# EAGLE board Midi_LED_Rings__Black_10x5_gerbers_v4 (EAGLE 6.5.0)
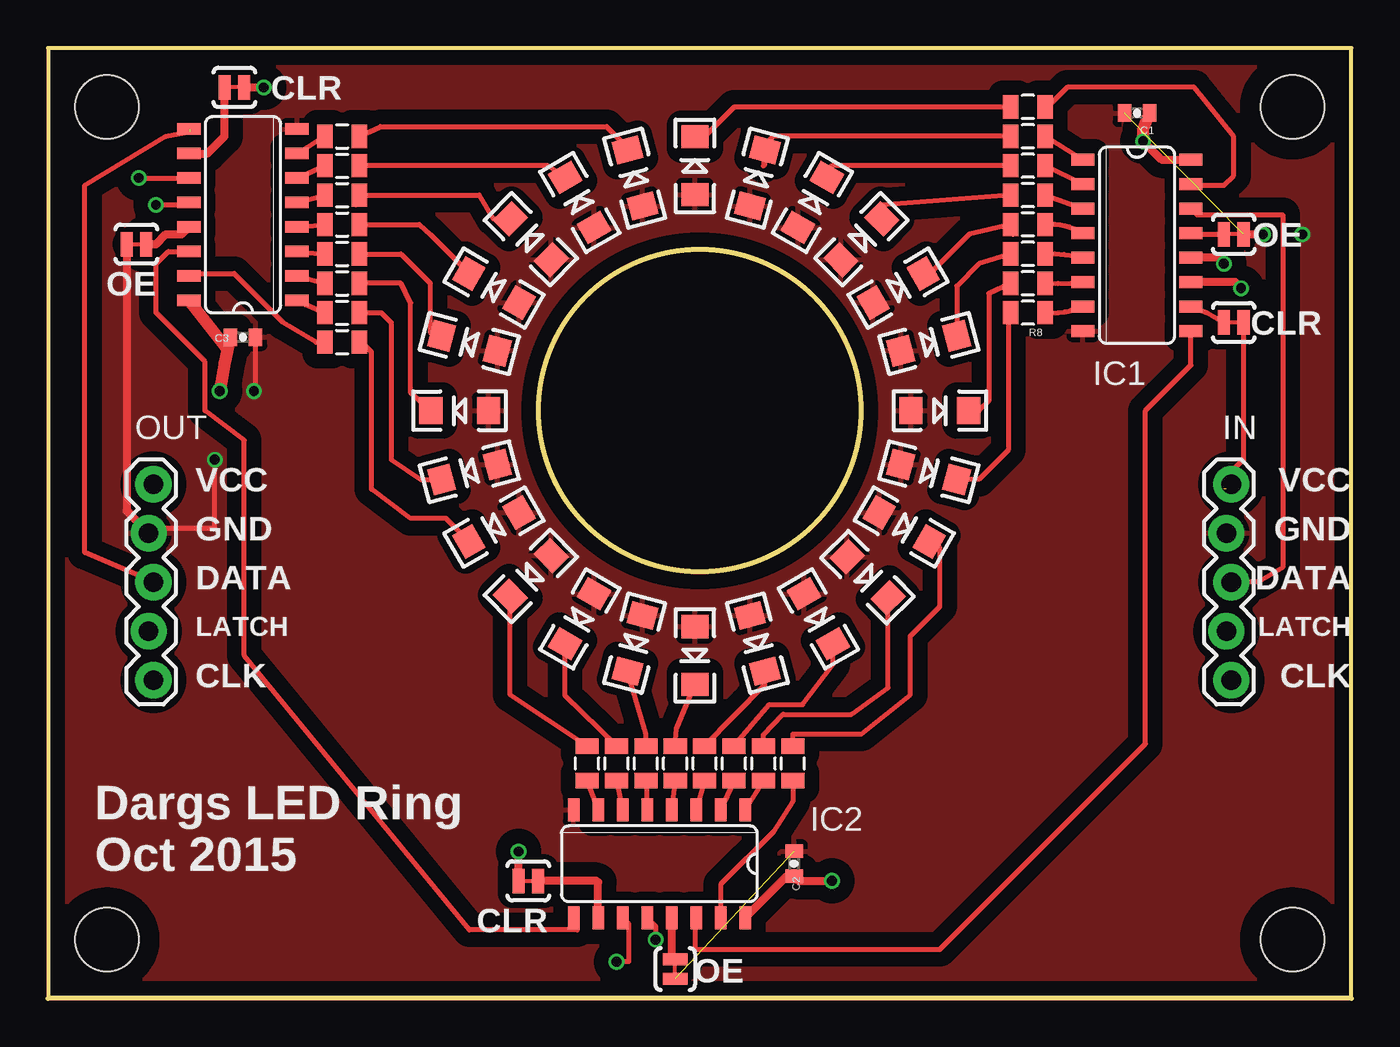
[diagram p0: board, top side]
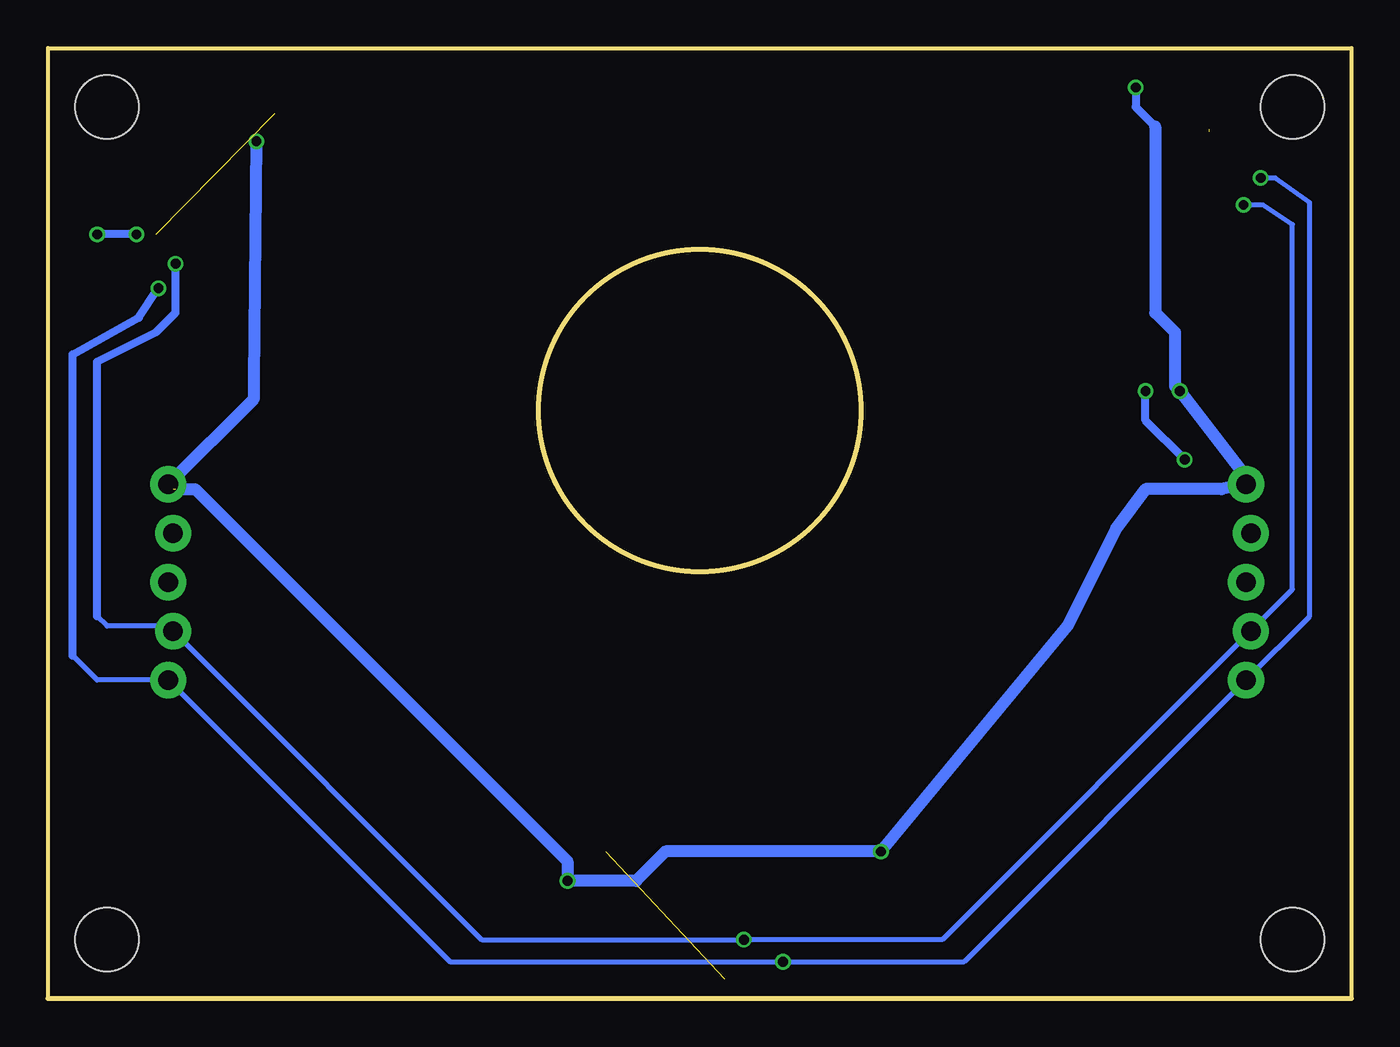
[diagram p1: board, bottom side, seen from below]

Size 67.56 x 49.28 mm. Coordinates in mm from the lower left corner, seen from the top.
Outline: 67.56,0 67.56,49.28 0,49.28 0,0 67.56,0
Outline: circle at 33.78,30.48 radius 8.35
Copper layers (1*16): Top 0.035mm / dielectric 1.5mm / Bottom 0.035mm
Design rules "ITEADstudio_DRC": minimum track width 6mil, minimum drill 12mil, track to track 6mil, track to pad 6mil, pad to pad 6mil, via to via 6mil, smd to smd 0mil, copper to edge 10mil, drill to drill 10mil, minimum pad ring 10mil, minimum via ring 6mil, stop-mask expansion 2mil, vias tented up to drill 100mil, thermal gap 10mil

## Footprints (pad centres in the part's own frame; a part is rotated, then mirrored left to right if it is on the bottom)
0402-CAP = smd 0.7 x 0.9: 1 -0.65,0; 2 0.65,0
SO16 = smd 0.6 x 1.2: 1 -4.445,-2.8; 2 -3.175,-2.8; 3 -1.905,-2.8; 4 -0.635,-2.8; 5 0.635,-2.8; 6 1.905,-2.8; 7 3.175,-2.8; 8 4.445,-2.8; 9 4.445,2.8; 10 3.175,2.8; 11 1.905,2.8; 12 0.635,2.8; 13 -0.635,2.8; 14 -1.905,2.8; 15 -3.175,2.8; 16 -4.445,2.8
1X05_LOCK = drill 1.016 pad 1.88: 1 0,0.127; 2 2.54,-0.127; 3 5.08,0.127; 4 7.62,-0.127; 5 10.16,0.127
STAND-OFF = hole 3.302: 0,0
LED-1206 = smd 1.2 x 1.4: A -1.5,0; C 1.5,0
0805 = smd 0.8 x 1.2: 1 -0.9,0; 2 0.9,0
SJ_2S-TRACE = smd 0.635 x 1.27: 1 -0.508,0; 2 0.508,0

## Placement (x,y rotation side)
C1  0.1uF  [0402-CAP]  56.45,45.91 180 top
C2  0.1uF  [0402-CAP]  38.67,6.99 90 top
C3  0.1uF  [0402-CAP]  10.1,34.29 0 top
IC1  74LS595D  [SO16]  56.45,39.05 270 top
IC2  74LS595D  [SO16]  31.69,6.99 180 top
IC3  74LS595D  [SO16]  10.1,40.64 90 top
IN  [1X05_LOCK]  61.21,26.67 270 top
JP1  STAND-OFF  [STAND-OFF]  64.52,46.23 0 bottom
JP10  STAND-OFF  [STAND-OFF]  64.52,3.05 0 bottom
JP11  STAND-OFF  [STAND-OFF]  3.05,3.05 0 bottom
JP12  STAND-OFF  [STAND-OFF]  3.05,46.23 0 bottom
LED1  1  [LED-1206]  33.53,43.18 90 top
LED2  2  [LED-1206]  36.77,42.55 75 top
LED3  3  [LED-1206]  39.62,41.27 60 top
LED4  4  [LED-1206]  42.16,39.37 45 top
LED5  5  [LED-1206]  44.07,36.83 30 top
LED6  6  [LED-1206]  45.66,33.97 15 top
LED7  7  [LED-1206]  46.23,30.48 0 top
LED8  8  [LED-1206]  45.66,27.3 345 top
LED9  9  [LED-1206]  44.39,24.45 330 top
LED10  10  [LED-1206]  42.48,21.84 315 top
LED11  11  [LED-1206]  39.94,19.68 300 top
LED12  12  [LED-1206]  36.77,18.41 285 top
LED13  13  [LED-1206]  33.53,17.78 270 top
LED14  195  [LED-1206]  30.42,18.41 255 top
LED15  15  [LED-1206]  27.56,19.68 240 top
LED16  16  [LED-1206]  25.02,21.91 225 top
LED17  17  [LED-1206]  23.11,24.45 210 top
LED18  18  [LED-1206]  21.84,27.3 195 top
LED19  19  [LED-1206]  21.34,30.48 180 top
LED20  20  [LED-1206]  21.84,33.97 165 top
LED21  21  [LED-1206]  23.11,36.83 150 top
LED22  22  [LED-1206]  25.02,39.37 135 top
LED23  23  [LED-1206]  27.56,41.27 120 top
LED24  24  [LED-1206]  30.42,42.55 105 top
OUT  [1X05_LOCK]  5.33,26.67 270 top
R1  300  [0805]  50.8,46.23 180 top
R2  300  [0805]  50.8,44.7 180 top
R3  300  [0805]  50.8,43.18 180 top
R4  300  [0805]  50.8,41.66 180 top
R5  300  [0805]  50.8,40.13 180 top
R6  300  [0805]  50.8,38.61 180 top
R7  300  [0805]  50.8,37.08 180 top
R8  300  [0805]  50.8,35.56 180 top
R9  300  [0805]  38.61,12.19 90 top
R10  300  [0805]  35.56,12.19 90 top
R11  300  [0805]  37.08,12.19 90 top
R12  300  [0805]  34.04,12.19 90 top
R13  300  [0805]  32.51,12.19 90 top
R14  300  [0805]  30.99,12.19 90 top
R15  300  [0805]  29.46,12.19 90 top
R16  300  [0805]  27.94,12.19 90 top
R21  300  [0805]  15.24,34.04 0 top
R22  300  [0805]  15.24,37.08 0 top
R23  300  [0805]  15.24,35.56 0 top
R24  300  [0805]  15.24,38.61 0 top
R25  300  [0805]  15.24,40.13 0 top
R26  300  [0805]  15.24,41.66 0 top
R27  300  [0805]  15.24,43.18 0 top
R28  300  [0805]  15.24,44.7 0 top
SJ1  SOLDERJUMPERTRACE  [SJ_2S-TRACE]  61.47,35.05 180 top
SJ2  SOLDERJUMPERTRACE  [SJ_2S-TRACE]  61.47,39.62 180 top
SJ3  SOLDERJUMPERTRACE  [SJ_2S-TRACE]  24.89,6.1 0 top
SJ4  SOLDERJUMPERTRACE  [SJ_2S-TRACE]  32.51,1.52 90 top
SJ5  SOLDERJUMPERTRACE  [SJ_2S-TRACE]  9.65,47.24 180 top
SJ6  SOLDERJUMPERTRACE  [SJ_2S-TRACE]  4.57,39.12 0 top

## Library data of the parts
C1-C3 IC1-IC3 JP1 JP10-JP12 R1-R16 R21-R28 = SparkFun
IN OUT = SparkFun-Connectors
LED1-LED24 = SparkFun-LED
SJ1-SJ6 = SparkFun-Passives

## Nets
1-2: IC1.9 IC2.14
2: LED2.C R2.2
2-3: IC2.9 IC3.14
3: LED3.C R3.2
4: LED4.C R4.2
5: LED5.C R5.2
6: LED6.C R6.2
7: LED7.C R7.2
8: LED8.C R8.2
9: LED9.C R9.2
10: LED10.C R11.2
11: LED11.C R10.2
12: LED12.C R12.2
13: LED13.C R13.2
14: LED14.C R14.2
15: LED15.C R15.2
16: LED16.C R16.2
17: LED17.C R21.2
18: LED18.C R23.2
19: LED19.C R22.2
20: LED20.C R24.2
21: LED21.C R25.2
22: LED22.C R26.2
23: LED23.C R27.2
24: LED24.C R28.2
CLK: IC1.11 IC2.11 IC3.11 IN.5 OUT.5
DATAIN: IC1.14 IN.3
DATAOUT: IC3.9 OUT.3
GND: C1.2 C2.2 C3.2 IC1.8 IC2.8 IC3.8 IN.2 LED1.A LED2.A LED3.A LED4.A LED5.A LED6.A LED7.A LED8.A LED9.A LED10.A LED11.A LED12.A LED13.A LED14.A LED15.A LED16.A LED17.A LED18.A LED19.A LED20.A LED21.A LED22.A LED23.A LED24.A OUT.2 SJ2.1 SJ4.1 SJ6.1
LATCH: IC1.12 IC2.12 IC3.12 IN.4 OUT.4
N$1: IC1.15 R1.1
N$2: IC1.1 R2.1
N$3: IC1.2 R3.1
N$4: IC1.3 R4.1
N$5: IC1.4 R5.1
N$6: IC1.5 R6.1
N$7: IC1.6 R7.1
N$8: IC1.7 R8.1
N$9: IC2.15 R9.1
N$10: IC2.1 R11.1
N$11: IC2.2 R10.1
N$12: IC2.3 R12.1
N$13: IC2.4 R13.1
N$14: IC2.5 R14.1
N$15: IC2.6 R15.1
N$16: IC2.7 R16.1
N$17: IC3.15 R21.1
N$18: IC3.1 R23.1
N$19: IC3.2 R22.1
N$20: IC3.3 R24.1
N$21: IC3.4 R25.1
N$22: IC3.5 R26.1
N$23: IC3.6 R27.1
N$24: IC3.7 R28.1
N$25: IC2.13 SJ4.2
N$26: IC2.10 SJ3.2
N$27: IC3.10 SJ5.2
N$28: IC3.13 SJ6.2
N$30: LED1.C R1.2
OE: IC1.13 SJ2.2
SCL: IC1.10 SJ1.2
VCC: C1.1 C2.1 C3.1 IC1.16 IC2.16 IC3.16 IN.1 OUT.1 SJ1.1 SJ3.1 SJ5.1

## Tracks (layer width: path | path; a pad name or v marks a point on that pad's centre or on a via)
1-2
  Top 0.254: IC2.14 33.53,4.12 33.53,2.54 46.23,2.54 56.9,13.21 56.9,30.48 59.25,32.84 IC1.9
2
  Top 0.254: R2.2 37.59,44.7 37.08,44.2 37.08,43.18 37.16,43.25 LED2.C
2-3
  Top 0.254: IC2.9 27.43,3.99 27.43,3.56 21.84,3.56 10.16,17.78 10.16,28.96 8.13,30.48 8.13,33.02 5.59,35.56 5.59,38.1 6.22,38.73 IC3.14
3
  Top 0.254: 50.02,43.18 R3.2 40.64,43.18 40.37,42.91 LED3.C
4
  Top 0.254: R4.2 43.18,41.15 43.23,41.1 LED4.C
5
  Top 0.254: 50.02,39.62 R5.2 47.75,39.62 45.71,37.58 LED5.C
6
  Top 0.254: R6.2 48.26,38.1 47.1,36.95 LED6.C
7
  Top 0.254: LED7.C 48.26,30.48 48.77,30.99 48.77,36.58 R7.2
8
  Top 0.254: R8.2 49.78,35.05 49.78,28.45 48.25,26.92 LED8.C
9
  Top 0.254: R9.2 38.61,13.72 42.16,13.72 44.7,15.75 44.7,18.8 46.23,20.32 46.23,23.37 45.9,23.7 LED9.C
10
  Top 0.254: R11.2 37.08,13.67 38.1,14.73 41.66,14.73 43.54,16.11 LED10.C
11
  Top 0.254: R10.2 37.39,15.24 39.12,15.24 40.69,17.32 LED11.C
12
  Top 0.254: R12.2 37.16,16.28 LED12.C
13
  Top 0.254: R13.2 32.58,13.98 LED13.C
14
  Top 0.254: R14.2 30.99,13.72 LED14.C
15
  Top 0.254: R15.2 26.81,15.69 LED15.C
16
  Top 0.254: R16.2 23.96,15.74 LED16.C
17
  Top 0.254: LED17.C 20.62,24.89 18.8,24.89 16.76,26.42 16.76,33.53 16.38,33.91 R21.2
18
  Top 0.254: R23.2 16.46,35.56 17.27,35.56 17.78,35.05 17.78,27.94 19.31,26.92 LED18.C
19
  Top 0.254: LED19.C 18.8,31.39 18.8,36.07 18.29,37.08 R22.2
20
  Top 0.254: 15.95,38.61 R24.2 18.29,38.61 19.81,37.08 19.81,34.54 20,34.36 LED20.C
21
  Top 0.254: R25.2 19.26,40.13 19.81,39.62 21.82,37.62 LED21.C
22
  Top 0.254: 15.95,41.15 R26.2 22.35,41.66 23.07,40.43 LED22.C
23
  Top 0.254: LED23.C 25.91,43.18 R27.2
24
  Top 0.254: R28.2 17.22,45.21 28.96,45.21 30.17,43.99 LED24.C
CLK  (via drill 0.51)
  Top 0.254: v4.7,42.55 IC3.11 | IC2.11 30.1,3.87 30.1,1.91 v29.46,1.91
  Top 0.406: v61.85,36.83 61.53,37.15 IC1.11
  Bottom 0.254: v4.7,42.55 3.94,42.55 2.16,41.27 2.16,19.81 OUT.5 20.07,1.91 v29.46,1.91 46.74,1.91 IN.5 65.02,16.51 66.29,17.78
  Bottom 0.406: 66.29,17.78 66.29,33.4 62.87,35.31 v61.85,36.83
DATAIN
  Top 0.254: IC1.14 59.57,40.64 64.01,40.64 64.01,22.35 62.74,21.59 IN.3
DATAOUT  (1 unrouted)
  Top 0.254: OUT.3 1.91,23.11 1.91,42.16 6.1,44.7 7.37,44.96 | 7.37,45.09 IC3.9
GND  (via drill 0.51)  (2 unrouted)
  Top 0.254: OUT.2 5.46,24.38 8.64,24.38 v8.64,27.94 | v10.67,31.5 10.75,31.57 C3.2
  Top 0.406: SJ6.1 4.06,25.27 OUT.2 | SJ2.1 v62.99,39.62
  Bottom 0.406: v8.64,27.94 10.67,29.97 v10.67,31.5 | v62.99,39.62 v65.02,39.62
  pour Top (isolate 0.762): 67.06,0.51 67.06,48.77 0.51,48.77 0.51,0.51
LATCH  (via drill 0.51)
  Top 0.254: IC2.12 31.5,3.74 v31.5,3.05 | IC3.12 7.17,41.15 v5.59,41.15
  Top 0.406: v60.96,38.1 60.64,38.42 IC1.12
  Bottom 0.254: 65.02,19.81 64.52,19.3 61.34,19.3 IN.4 45.09,3.05 v31.5,3.05 21.21,3.05 OUT.4 3.05,21.21 3.05,40.13 4.57,41.15 v5.59,41.15
  Bottom 0.406: 65.02,19.81 65.02,33.02 61.98,34.54 60.96,35.56 v60.96,38.1
N$1
  Top 0.254: IC1.15 59.31,42.16 60.96,42.16 61.47,42.67 61.47,44.7 59.44,47.24 52.83,47.24 51.9,46.31 R1.1
N$2
  Top 0.254: R2.1 IC1.1
N$3
  Top 0.254: R3.1 IC1.2
N$4
  Top 0.254: R4.1 IC1.3
N$5
  Top 0.254: R5.1 arc-37 IC1.4
N$6
  Top 0.254: R6.1 arc-16 IC1.5
N$7
  Top 0.254: R7.1 arc9 IC1.6
N$8
  Top 0.254: R8.1 arc27 IC1.7
N$9
  Top 0.254: R9.1 38.61,10.21 37.59,8.64 34.86,5.91 IC2.15
N$10
  Top 0.254: R11.1 IC2.1
N$11
  Top 0.254: R10.1 IC2.2
N$12
  Top 0.254: R12.1 IC2.3
N$13
  Top 0.254: R13.1 IC2.4
N$14
  Top 0.254: R14.1 IC2.5
N$15
  Top 0.254: R15.1 IC2.6
N$16
  Top 0.254: R16.1 IC2.7
N$17
  Top 0.254: IC3.15 7.42,37.59 9.65,37.59 12.19,35.05 13.89,34.04 R21.1
N$18
  Top 0.254: IC3.1 R23.1
N$19
  Top 0.254: IC3.2 R22.1
N$20
  Top 0.254: IC3.3 R24.1
N$21
  Top 0.254: IC3.4 R25.1
N$22
  Top 0.254: IC3.5 R26.1
N$23
  Top 0.254: IC3.6 R27.1
N$24
  Top 0.254: IC3.7 R28.1
N$25
  Top 0.406: IC2.13 32.32,2.22 SJ4.2
N$26
  Top 0.406: IC2.10 28.51,6.03 28.45,6.1 SJ3.2
N$27
  Top 0.406: IC3.10 8.26,43.81 9.14,44.7 SJ5.2
N$28
  Top 0.406: SJ6.2 5.59,39.12 6.1,39.62 6.92,39.62 IC3.13
N$30
  Top 0.254: R1.2 35.56,46.23 33.69,44.36 LED1.C
OE
  Top 0.254: IC1.13 59.31,39.62 SJ2.2
SCL
  Top 0.254: IC1.10 60.08,35.56 SJ1.2
VCC  (via drill 0.51)  (1 unrouted)
  Top 0.254: 9.2,33.78 C3.1 | 38.28,6.33 C2.1 | SJ1.1 61.98,27.94 60.96,26.92 60.96,26.42
  Top 0.406: v56.77,44.45 57.72,43.5 IC1.16 | IC2.16 38.28,6.33 | C2.1 38.91,6.1 v40.64,6.1 | SJ3.1 v24.38,7.62 | SJ5.1 v11.18,47.24
  Top 0.61: IC3.16 9.2,33.78 | C3.1 9.14,32.97 v8.89,31.5 | C1.1 56.77,45.07 v56.77,44.45
  Bottom 0.254: 5.52,27.11 OUT.1
  Bottom 0.406: IN.1 61.09,26.42 | v11.18,47.24 11.18,46.23 10.16,45.21 | 9.14,31.75 v8.89,31.5
  Bottom 0.61: v8.89,31.5 5.52,27.11 | IN.1 56.9,31.11 56.9,32 v56.77,44.45 | 61.09,26.42 59.94,26.42 40.64,7.11 v40.64,6.1 37.08,6.1 35.56,7.62 v24.38,7.62 14.73,19.3 12.19,24.38 10.67,26.42 6.73,26.42 OUT.1 | 10.16,45.21 10.16,35.56 9.14,34.54 9.14,31.75

## Text on the board
tPlace: CLR | OE | OE | CLR | VCC | VCC | GND | GND | DATA | DATA | LATCH | LATCH | CLK | CLK | Dargs LED Ring / Oct 2015 | CLR | OE